# Altium PCB PCB.PcbDoc
Units mm, origin at the board's own origin, x right, y up, seen from the top; angles counter-clockwise.
Board outline 95 x 40.5 mm, 2 copper layers (TOP, BOT), stack 1.636 mm thick; 76 components, 72 nets, 274 pads, 127 vias.
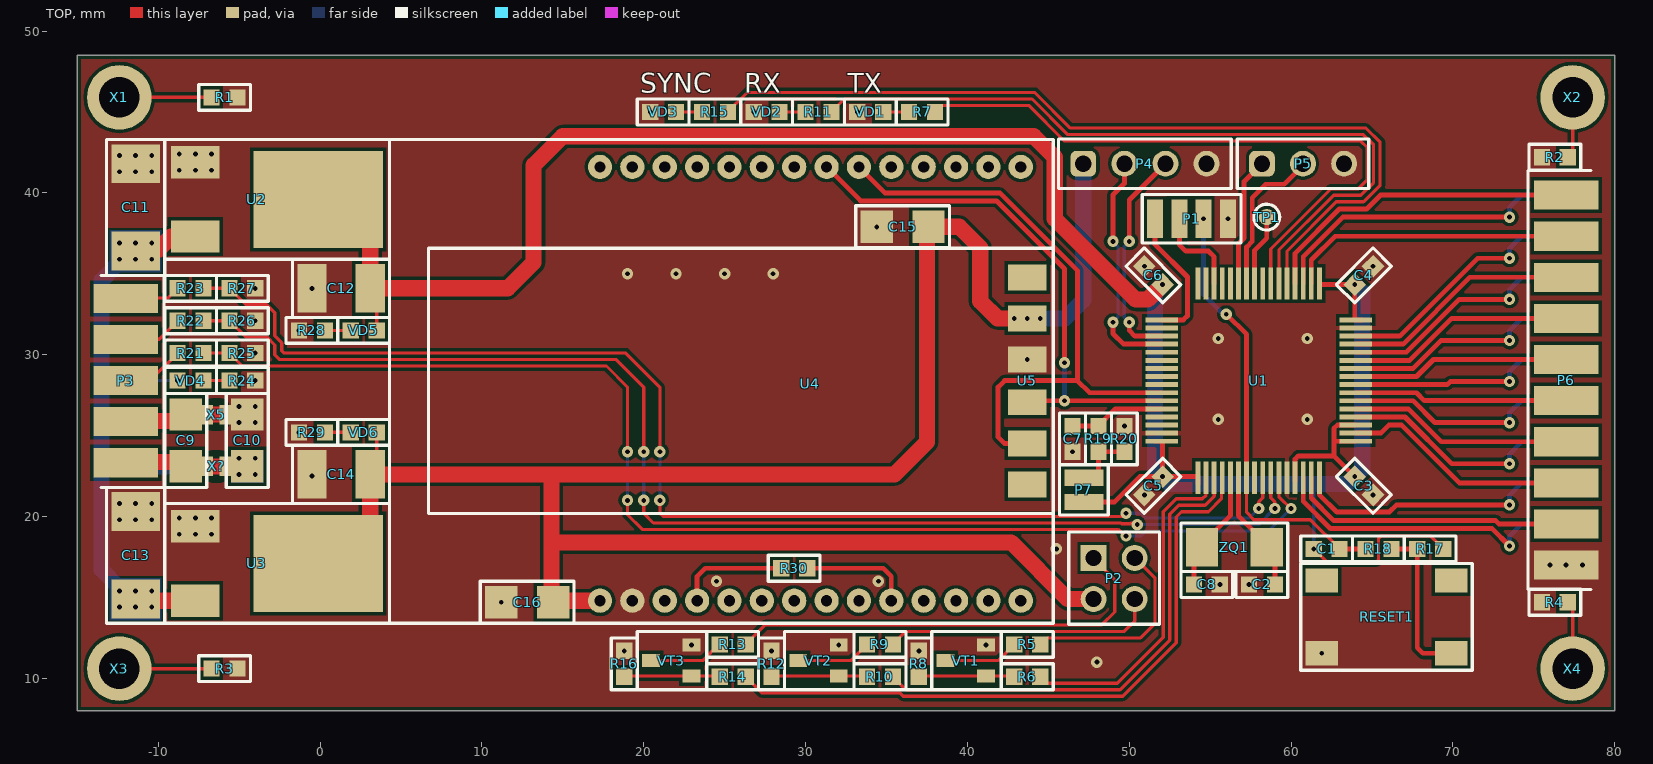
[diagram p0: TOP view]
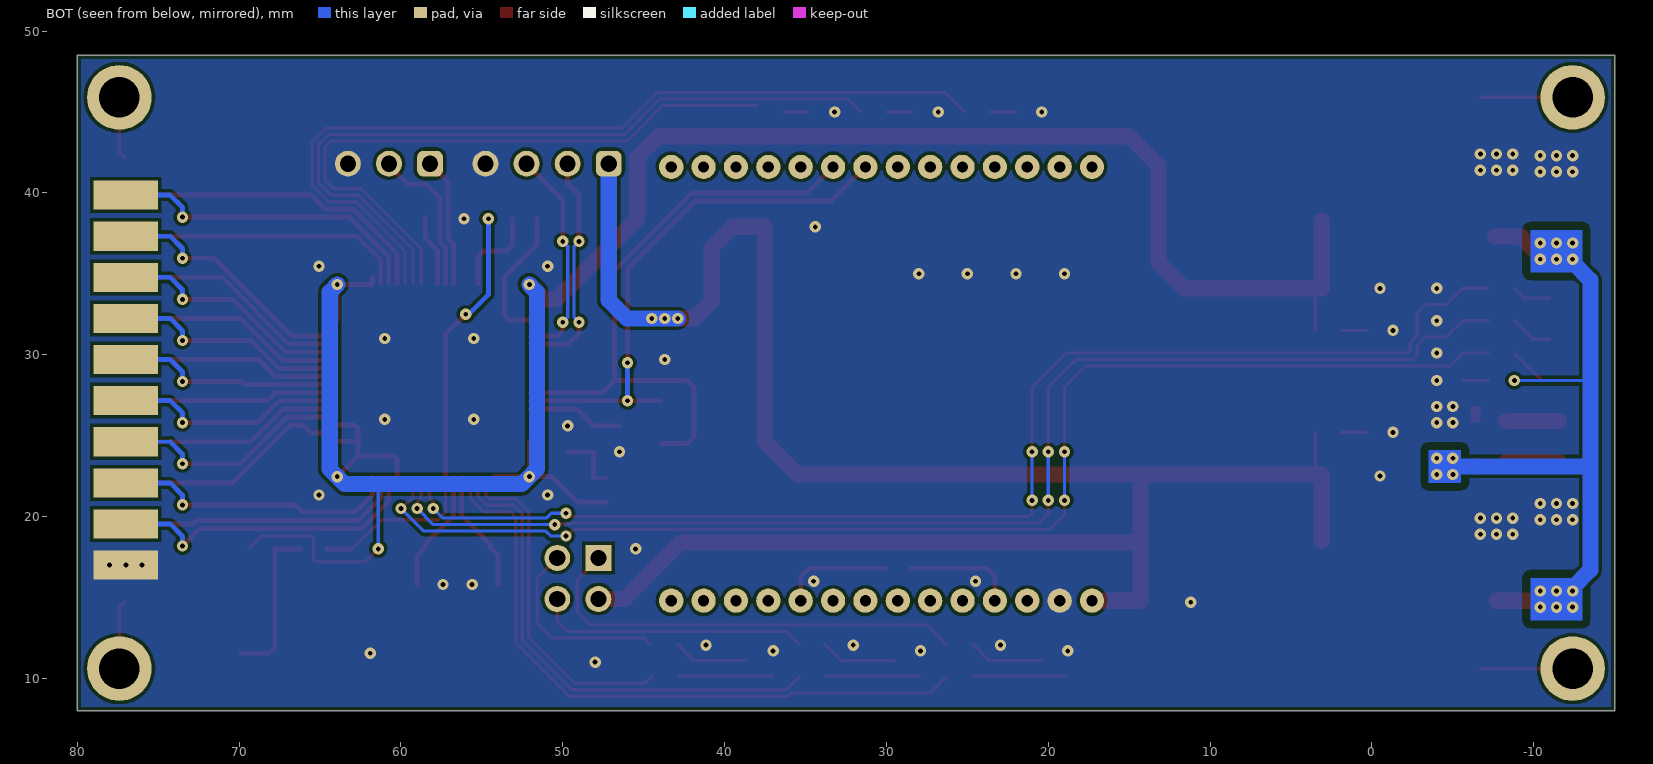
[diagram p1: BOT view, seen from below]

## Layer stack, top to bottom
Top Solder: solder mask 0.0102, Solder Resist, Dk 3.5
TOP: signal copper 0.018
Dielectric 1: core 1.6, FR-4, Dk 4.2
BOT: signal copper 0.018
Bottom Solder: solder mask 0.0102, Solder Resist, Dk 3.5

## Board outline
-15,8 80,8 80,48.5 -15,48.5

## Design rules (kind name [scope] priority, off if disabled: settings)
AssemblyTestPointUsage [All] p1 off:
AssemblyTestpoint [All] p1 off: testpointundercomponent=TRUE minsize=1.016 maxsize=2.54 preferedsize=1.524 minholesize=0 maxholesize=1.016 preferedholesize=0.813 testpointgrid=0.025 usegrid=TRUE gridtolerance=0 allowsidetop=TRUE allowsidebottom=TRUE
BoardOutlineClearance [Not(OnTopSilkscreen Or OnBottomSilkscreen)] p1: gap=0.25 ignorepadtopadclearanceinfootprint=FALSE
Clearance Clearance_NPTH [IsPad And Not(PadIsPlated) And HasRoundHole] p1: gap=0.2 ignorepadtopadclearanceinfootprint=FALSE except(0.25: Arc-Hole Track-Hole SMDPad-Hole THPad-Hole Via-Hole Fill-Hole Poly-Hole Region-Hole Text-Hole) // Non-plated hole to copper
Clearance Clearance_PTH_INT [IsPad And PadIsPlated And HasRoundHole vs OnMid] p2: gap=0.2 ignorepadtopadclearanceinfootprint=FALSE except(0.35: Arc-Hole Track-Hole SMDPad-Hole THPad-Hole Via-Hole Fill-Hole Poly-Hole Region-Hole Text-Hole) // Plated hole without pad to copper
Clearance Clearance_PAD_VIA [IsPad And Not(OnMid) And OnOutside vs IsVia And OnOutside] p3: gap=0.2 ignorepadtopadclearanceinfootprint=FALSE // Minimum gap between SMD pad and via for valid solder mask bridge
Clearance [All] p4: gap=0.2 ignorepadtopadclearanceinfootprint=TRUE except(0.49: Fill-Poly Fill-Region Poly-Poly Poly-Region Region-Region) // Class 4 generic clearance
ComponentClearance ComponentClearanceTop [OnLayer('TOP') And Not(InComponentClass('NoCollision')) And Not(IsNetTieComponent) vs OnLayer('TOP') And Not(InComponentClass('NoCollision')) And Not(IsNetTieComponent)] p1: gap=0.15 collisioncheckmode=3 verticalgap=0.5 showdistances=TRUE
ComponentClearance ComponentClearanceBot [OnLayer('BOT') And Not(InComponentClass('NoCollision')) And Not(IsNetTieComponent) vs OnLayer('BOT') And Not(InComponentClass('NoCollision')) And Not(IsNetTieComponent)] p2: gap=0.15 collisioncheckmode=3 verticalgap=0.5 showdistances=TRUE
DiffPairsRouting [All] p1 off: maxlimit=0.254 minlimit=0.254 mostfreqgap=0.254 toplayer_minwidth=0.381 toplayer_maxwidth=0.381 toplayer_prefwidth=0.381 bottomlayer_minwidth=0.381 bottomlayer_maxwidth=0.381 bottomlayer_prefwidth=0.381 maxuncoupledlength=12.7
FabricationTestPointUsage [All] p1 off: valid=0 allowmultiple=FALSE
FabricationTestpoint [All] p1 off: side=3 testpointundercomponent=TRUE minsize=1.016 maxsize=2.54 preferedsize=1.524 minholesize=0 maxholesize=1.016 preferedholesize=0.813 testpointgrid=0.025 allowsidetop=TRUE allowsidebottom=TRUE usegrid=TRUE gridtolerance=0
FanoutControl Fanout_BGA [IsBGA] p1 off: bgadir=Out bgaviamode=Centered fanoutstyle=Auto fanoutdirection=Alternating viagrid=0.025 // Fanout_BGA (Default Rule)
FanoutControl Fanout_LCC [IsLCC] p2 off: bgadir=Out bgaviamode=Centered fanoutstyle=Auto fanoutdirection=Alternating viagrid=0.025 // Fanout_LCC (Default Rule)
FanoutControl Fanout_SOIC [IsSOIC] p3 off: bgadir=Out bgaviamode=Centered fanoutstyle=Auto fanoutdirection=Alternating viagrid=0.025 // Fanout_SOIC (Default Rule)
FanoutControl Fanout_Small [(CompPinCount < 5)] p4 off: bgadir=Out bgaviamode=Centered fanoutstyle=Auto fanoutdirection=OutThenIn viagrid=0.025 // Fanout_Small (Default Rule)
FanoutControl Fanout_Default [All] p5 off: bgadir=Out bgaviamode=Centered fanoutstyle=Auto fanoutdirection=Alternating viagrid=0.025 // Fanout_Default (Default Rule)
Height [All] p1 off: minheight=0 maxheight=35 prefheight=15
HoleSize HoleSize_PTH [IsVia or (IsPad And PadIsPlated)] p1: absolutevalues=TRUE maxlimit=6 minlimit=0.3 maxpercent=80.000 minpercent=20.000 // Plated holes
HoleSize HoleSize_NPTH [IsPad And Not(PadIsPlated)] p2: absolutevalues=TRUE maxlimit=6 minlimit=0.5 maxpercent=80.000 minpercent=20.000 // Non-plated holes
HoleToHoleClearance [All] p1 off: gap=0.4 allowstackedmicrovias=FALSE
LayerPairs [All] p1 off: enforce=TRUE
MinimumAnnularRing [All] p1: minimumring=0.2
MinimumSolderMaskSliver [Not(InComponent('DD101'))] p1: minsoldermaskwidth=0.15
NetAntennae [Not(InNet('5VIN') Or InNet('GND') Or  InNet('GNDBAT'))] p1: netantennaetolerance=0
PlaneClearance [All] p1 off: clearance=1
PlaneConnect [All] p1 off: planeconnectstyle=Relief reliefexpansion=0.5 reliefentries=4 reliefconductorwidth=0.5 reliefairgap=0.5
PolygonConnect PolygonConnect_Direct [IsPolygon vs InPadClass('HeatsinkPad') Or IsVia or InNet('PGND') or InNet('DGND')] p1: connectstyle=Direct reliefconductorwidth=1 reliefentries=4 polygonreliefangle="45 Angle" airgapwidth=0.5 // Direct connection between POLYCONN pads and shield polygons
PolygonConnect [All] p2: connectstyle=Direct reliefconductorwidth=0.4 reliefentries=4 polygonreliefangle="90 Angle" airgapwidth=0.2
RoutingCorners [All] p1 off: cornerstyle=Round minsetback=2 maxsetback=2
RoutingLayers [All] p1 off: top layer_v5=TRUE bottom layer_v5=TRUE
RoutingPriority [All] p1 off: routingpriority=0
RoutingTopology [All] p1 off: topology=Shortest
RoutingVias [All] p1: holewidth=0.3 width=0.6 viastyle="Through Hole" minholewidth=0.3 minwidth=0.5 maxholewidth=1.2 maxwidth=5
SilkToBoardRegionClearance [All] p1 off:
SilkToSilkClearance [All] p1 off: silktosilkclearance=0
SilkToSolderMaskClearance SilkscreenOverComponentPads [IsPad] p1: minsilkscreentomaskgap=0.15 clearancetoexposedcopper=TRUE
SolderMaskExpansion [All] p1: expansion=0.05
Width [All] p1: maxlimit=90 minlimit=0.2 preferedwidth=0.2 // Class 4
4 further rules are at their usual default settings.

## Components (designator, comment, footprint, x,y, rotation, side; value= is the part's Value field where it differs from the comment)
C1 "1u" C_0603/1608 62.2,18 r0 top
C2 "22p" C_0603/1608 58.2,15.8 r180 top
C3 "10u" C_0603/1608 64.5,21.9 r315 top
C4 "10u" C_0603/1608 64.5,34.9 r45 top
C5 "10u" C_0603/1608 51.5,21.9 r225 top
C6 "10u" C_0603/1608 51.5,34.9 r135 top
C7 "1u" C_0603/1608 46.5,24.8 r270 top
C8 "22p" C_0603/1608 54.8,15.8 r0 top
C9 "10u" C_1206/3216 -8.3,24.7 r270 top
C10 "10u" C_1206/3216 -4.5,24.7 r270 top
C11 "10u" TECAP_TYPE_C -11.4,39.1 r90 top
C12 "10u" TECAP_TYPE_B 1.3,34.1 r180 top
C13 "10u" TECAP_TYPE_C -11.4,17.6 r90 top
C14 "10u" TECAP_TYPE_B 1.3,22.6 r180 top
C15 "10u" C_1206/3216 36,37.9 r180 top
C16 "10u" C_1206/3216 12.8,14.7 r180 top
P1 "Debug" HDR_SMD_1X4_1.50 56.1,38.4 r180 top
P2 "Header 2x2" HDR_M_2X2_2.54 49.07,17.44 r0 top
P3 "Power" HDR_M_1X5_2.54_OUTLINE -14.54,37.29 r90 top
P4 "Rasp Pi" HDR_M_1X4_2.54 50.97,41.8 r0 top
P5 "PowerSupply" HDR_M_1X3_2.54 60.74,41.8 r0 top
P6 "Servo signals" HDR_M_2X10_2.54_OUTLINE 79.54,25.89 r270 top
P7 "BOOT_JMP" HDR_SMD_1X2_1.50 47.2,20.9 r90 top
R1 "100k" R_0603/1608 -5.9,45.9 r0 top
R2 "100k" R_0603/1608 76.3,42.2 r180 top
R3 "100k" R_0603/1608 -5.9,10.6 r0 top
R4 "100k" R_0603/1608 76.3,14.7 r180 top
R5 "?" R_0603/1608 43.7,12.1 r0 top
R6 "10k" R_0603/1608 43.7,10.1 r0 top
R7 "?" R_0603/1608 37.2,45 r180 top
R8 "100k" R_0603/1608 37,10.9 r270 top
R9 "?" R_0603/1608 34.6,12.1 r0 top
R10 "10k" R_0603/1608 34.6,10.1 r0 top
R11 "?" R_0603/1608 30.8,45 r180 top
R12 "100k" R_0603/1608 27.9,10.9 r270 top
R13 "?" R_0603/1608 25.5,12.1 r0 top
R14 "10k" R_0603/1608 25.5,10.1 r0 top
R15 "?" R_0603/1608 24.4,45 r180 top
R16 "100k" R_0603/1608 18.8,10.9 r270 top
R17 "100k" R_0603/1608 68.6,18 r180 top
R18 "1k" R_0603/1608 65.4,18 r180 top
R19 "1k" R_0603/1608 48.1,24.8 r90 top
R20 "100k" R_0603/1608 49.7,24.8 r90 top
R21 "3k3" R_0603/1608 -8,30.1 r180 top
R22 "3k3" R_0603/1608 -8,32.1 r180 top
R23 "3k3" R_0603/1608 -8,34.1 r180 top
R24 "68R" R_0603/1608 -4.8,28.4 r180 top
R25 "5k" R_0603/1608 -4.8,30.1 r180 top
R26 "5k" R_0603/1608 -4.8,32.1 r180 top
R27 "5k" R_0603/1608 -4.8,34.1 r180 top
R28 "68R" R_0603/1608 -0.5,31.5 r0 top
R29 "68R" R_0603/1608 -0.5,25.2 r0 top
R30 "100k" R_0603/1608 29.3,16.8 r0 top
RESET1 "Button SPST" BUTTON_SMD_6x6 65.9,13.8 r90 top
TP1 "Debug pin" TP_SMD_D1.00 58.5,38.5 r0 top
U1 "STM32F373R" LQFP64 58,28.4 r90 top
U2 "LM1117DT-3.3/NOPB" TO252AA/DPAK -2.1,39.6 r270 top
U3 "LM1117DT-5.0/NOPB" TO252AA/DPAK -2.1,17.1 r270 top
U4 "HLK-RM04" HLK-RM04 30.3,27.8 r90 top
U5 "HM-10 BLE" HM-10 43.7,21.88 r90 top
VD1 "LED" LED_0603/1608 34,45 r180 top
VD2 "LED" LED_0603/1608 27.6,45 r180 top
VD3 "LED" LED_0603/1608 21.2,45 r180 top
VD4 "TO-3216BC-BF (G)" LED_0603/1608 -8,28.4 r0 top
VD5 "TO-3216BC-BF (G)" LED_0603/1608 2.7,31.5 r180 top
VD6 "TO-3216BC-BF (G)" LED_0603/1608 2.7,25.2 r180 top
VT1 "IRLML6244" SOT23-3 39.9,11.1 r180 top
VT2 "IRLML6244" SOT23-3 30.8,11.1 r180 top
VT3 "IRLML6244" SOT23-3 21.7,11.1 r180 top
X1 "Mounting hole" HOLE_M2_D4.0/2.5 -12.4,45.9 r0 top
X2 "Mounting hole" HOLE_M2_D4.0/2.5 77.4,45.9 r0 top
X3 "Mounting hole" HOLE_M2_D4.0/2.5 -12.4,10.6 r0 top
X4 "Mounting hole" HOLE_M2_D4.0/2.5 77.4,10.6 r0 top
X5 "" NET_TIE_1.0 -6.4,26.3 r0 top net-tie
X? "" NET_TIE_1.0 -6.4,23.1 r0 top net-tie
ZQ1 "NX5032GA-8MHz" "OSC_2PINS SMD" 56.5,18.1 r0 top

## Footprints (in the part's own frame and the unit in brackets; to place one, negate y for a bottom-side part, rotate by r counter-clockwise, add the part's x,y. Pads: shape width x height; smd on the part's side, far side on the other; paste and mask are expansions set on the pad)
BUTTON_SMD_6x6 [mm] "Simple quad button SMD 6x6mm"
  rect 1.5x2 smd: 1(-2.25,-4) 2(-2.25,4) 3(2.25,-4) 4(2.25,4)
  silkscreen extent -3.3,-5.3 3.3,5.3, body extent -3,-3 3,3, height 1
C_0603/1608 [mm] "Capacitor, SMD, 0603 (1608 metric)"
  rect 1x1 smd mask+0: 1(-0.8,0) 2(0.8,0)
  silkscreen extent -1.6,-0.8 1.6,0.8, body extent -0.8,-0.4 0.8,0.4, height 0.7
C_1206/3216 [mm] "Capacitor, SMD, 1206 (3216 metric)"
  rect 2x2 smd mask+0: 1(-1.6,0) 2(1.6,0)
  silkscreen extent -2.9,-1.3 2.9,1.3, body extent -1.6,-0.8 1.6,0.8, height 1.45
HDR_M_1X3_2.54 [mm] "Pitch 2.54"
  rrect50% 1.6x1.6 hole 1: 1(-2.54,0)
  round 1.6 hole 1: 2(0,0) 3(2.54,0)
  silkscreen extent -4.06,-1.52 4.06,1.52, body extent -3.81,-1.27 3.81,1.27, height 8.54
HDR_M_1X4_2.54 [mm] "Pitch 2.54"
  rrect50% 1.6x1.6 hole 1: 1(-3.81,0)
  round 1.6 hole 1: 2(-1.27,0) 3(1.27,0) 4(3.81,0)
  silkscreen extent -5.33,-1.52 5.33,1.52, body extent -5.08,-1.27 5.08,1.27, height 8.54
HDR_M_1X5_2.54_OUTLINE [mm] "Pitch 2.54"
  rect 1.8x4 smd mask+0: 1(-13.97,-2.54) 2(-11.43,-2.54) 3(-8.89,-2.54) 4(-6.35,-2.54) 5(-3.81,-2.54)
  silkscreen extent -15.49,-4.9 -2.4,-1, body extent -15.3,-3 -2.6,8.54, height 1.67
HDR_M_2X2_2.54 [mm] "Pitch 2.54"
  round 1.6 hole 1: 1(-1.27,-2.54) 3(1.27,-2.54) 4(1.27,0)
  rect 1.6x1.6 hole 1: 2(-1.27,0)
  silkscreen extent -2.8,-4.1 2.8,1.6, body extent -2.54,-3.81 2.54,1.27, height 8.54
HDR_M_2X10_2.54_OUTLINE [mm] "Pitch 2.54"
  rect 1.8x4 smd mask+0: 1(-13.97,-2.54) 3(-11.43,-2.54) 5(-8.89,-2.54) 7(-6.35,-2.54) 9(-3.81,-2.54) 11(-1.27,-2.54) 13(1.27,-2.54) 15(3.81,-2.54) 17(6.35,-2.54) 19(8.89,-2.54)
  rect 1.8x4 smd far side mask+0: 2(-13.97,-2.54) 4(-11.43,-2.54) 6(-8.89,-2.54) 8(-6.35,-2.54) 10(-3.81,-2.54) 12(-1.27,-2.54) 14(1.27,-2.54) 16(3.81,-2.54) 18(6.35,-2.54) 20(8.89,-2.54)
  silkscreen extent -15.49,-4.9 10.4,-1, body extent -15.3,-3 10.1,8.54, height 1.67
HDR_SMD_1X2_1.50 [mm] "Pitch 1.50"
  rect 1x2.4 smd mask+0: 1(0,0) 2(1.5,0)
  silkscreen extent -0.8,-1.5 2.3,1.5
HDR_SMD_1X4_1.50 [mm] "Pitch 1.50"
  rect 1x2.4 smd mask+0: 1(0,0) 2(1.5,0) 3(3,0) 4(4.5,0)
  silkscreen extent -0.8,-1.5 5.3,1.5
HLK-RM04 [mm]
  round 1.5 hole 0.7: 1(-13,13) 2(-13,11) 3(-13,9) 4(-13,7) 5(-13,5) 6(-13,3) 7(-13,1) 8(-13,-1) 9(-13,-3) 10(-13,-5) 11(-13,-7) 12(-13,-9) 13(-13,-11) 14(-13,-13) 15(13.8,-13) 16(13.8,-11) 17(13.8,-9) 18(13.8,-7) 19(13.8,-5) 20(13.8,-3) 21(13.8,-1) 22(13.8,1) 23(13.8,3) 24(13.8,5) 25(13.8,7) 26(13.8,9) 27(13.8,11) 28(13.8,13)
  silkscreen extent -14.4,-15 15.5,26, body extent -14,-14.5 15.06,25.6, height 8.82
HM-10 [mm]
  rect 1.6x2.4 smd mask+0: 1(0.1,0) 2(2.64,0) 3(5.18,0) 4(7.82,0) 5(10.36,0) 6(12.9,0)
  silkscreen extent -1.7,-1.6 14.7,37, body extent -1.3,-1.2 14.4,36.5, height 3.7
HOLE_M2_D4.0/2.5 [mm]
  round 4 hole 2.5: 1(0,0)
LED_0603/1608 [mm] "LED, SMD, 0603 (1608 metric)"
  rect 1x1 smd: A(-0.8,0) C(0.8,0)
  silkscreen extent -1.6,-0.8 1.6,0.8, body extent -0.8,-0.4 0.8,0.4, height 0.6
LQFP64 [mm]
  rect 2x0.3 smd mask+0.1: 1(-6,3.75) 2(-6,3.25) 3(-6,2.75) 4(-6,2.25) 5(-6,1.75) 6(-6,1.25) 7(-6,0.75) 8(-6,0.25) 9(-6,-0.25) 10(-6,-0.75) 11(-6,-1.25) 12(-6,-1.75) 13(-6,-2.25) 14(-6,-2.75) 15(-6,-3.25) 16(-6,-3.75) 33(6,-3.75) 34(6,-3.25) 35(6,-2.75) 36(6,-2.25) 37(6,-1.75) 38(6,-1.25) 39(6,-0.75) 40(6,-0.25) 41(6,0.25) 42(6,0.75) 43(6,1.25) 44(6,1.75) 45(6,2.25) 46(6,2.75) 47(6,3.25) 48(6,3.75)
  rect 0.3x2 smd mask+0.1: 17(-3.75,-6) 18(-3.25,-6) 19(-2.75,-6) 20(-2.25,-6) 21(-1.75,-6) 22(-1.25,-6) 23(-0.75,-6) 24(-0.25,-6) 25(0.25,-6) 26(0.75,-6) 27(1.25,-6) 28(1.75,-6) 29(2.25,-6) 30(2.75,-6) 31(3.25,-6) 32(3.75,-6) 49(3.75,6) 50(3.25,6) 51(2.75,6) 52(2.25,6) 53(1.75,6) 54(1.25,6) 55(0.75,6) 56(0.25,6) 57(-0.25,6) 58(-0.75,6) 59(-1.25,6) 60(-1.75,6) 61(-2.25,6) 62(-2.75,6) 63(-3.25,6) 64(-3.75,6)
  body extent -6,-6 6,6, height 1.6
NET_TIE_1.0 [mm] "Net tie, 0.8mm width"
  rect 1.2x1.2 smd mask-1: 1(-0.8,0) 2(0.8,0)
  TOP region: -0.3,-0.5 0.3,-0.5 0.3,0.5 -0.3,0.5
  body extent -0.2,-0.4 0.2,0.4, height 0.1
"OSC_2PINS SMD" [mm] "Crystal oscillator, SMD, 2 pins"
  rect 2x2.4 smd: 1(-2,0) 2(2,0)
  silkscreen extent -3.3,-1.5 3.3,1.5, body extent -1.6,-1.26 1.6,1.26, height 1
R_0603/1608 [mm] "Resistor, SMD, 0603 (1608 metric)"
  rect 1x1 smd mask+0: 1(-0.8,0) 2(0.8,0)
  silkscreen extent -1.6,-0.8 1.6,0.8, body extent -0.8,-0.4 0.8,0.4, height 0.45
SOT23-3 [mm] "SOT23, 3 pins"
  rect 1.1x0.8 smd: 1(-1.25,0.95) 2(-1.25,-0.95) 3(1.25,0)
  silkscreen extent -2.2,-1.8 2.1,1.8, body extent -1.13,-1.5 1.13,1.5, height 1.22
TECAP_TYPE_B [mm] "Tantalum capacitor, Type B, SMD"
  rect 1.8x3 smd: 1(-1.8,0) 2(1.8,0)
  silkscreen extent -3,-1.8 3,1.8, body extent -1.85,-1.5 1.85,1.5, height 2.1
TECAP_TYPE_C [mm] "Tantalum capacitor, Type C, SMD"
  rect 2.4x3 smd: 1(-2.7,0) 2(2.7,0)
  silkscreen extent -4.2,-1.8 4.2,1.8, body extent -3.1,-1.7 3.1,1.7, height 2.8
TO252AA/DPAK [mm] "TO252AA/DPAK package"
  rect 2x3 smd: 1(-2.3,-5.6) 2(2.3,-5.6)
  rect 6x8 smd: 3(0,2)
  silkscreen extent -3.7,-7.5 3.7,6.4, body extent -3.37,-6.01 3.37,4.38, height 2.39
TP_SMD_D1.00 [mm] "SMD test point, 1.0 mm diameter"
  round 1 smd paste-10: 1(0,0)
  silkscreen extent -0.8,-0.8 0.8,0.8, body extent -0.5,-0.5 0.5,0.5, height 0.1

## Part data
C1 C2 C3 C4 C5 C6 C7 C8 C9 C10 C15 C16: library part Capacitor, "Non-polarized capacitor"
C11 C12 C13 C14: library part "Capacitor polar", "Polarized capacitor"
P1 P4: library part "Header 4", "Header, 4-Pin", LatestRevisionDate=17-Jul-2002, LatestRevisionNote="Re-released for DXP Platform.", Publisher="Altium Limited"
P2: "Header, 2-Pin", LatestRevisionDate=17-Jul-2002, LatestRevisionNote="Re-released for DXP Platform.", Publisher="Altium Limited"
P3: library part "Header 5", "Header, 5-Pin", LatestRevisionDate=17-Jul-2002, LatestRevisionNote="Re-released for DXP Platform.", Publisher="Altium Limited"
P5: library part "Header 3", "Header, 3-Pin", LatestRevisionDate=17-Jul-2002, LatestRevisionNote="Re-released for DXP Platform.", Publisher="Altium Limited"
P6: library part "Header 2x10", "Header, 20-Pin", LatestRevisionDate=17-Jul-2002, LatestRevisionNote="Re-released for DXP Platform.", Publisher="Altium Limited"
P7: library part "Header 2", "Header, 2-Pin", LatestRevisionDate=17-Jul-2002, LatestRevisionNote="Re-released for DXP Platform.", Publisher="Altium Limited"
R1 R2 R3 R4 R5 R6 R7 R8 R9 R10 R11 R12 R13 R14 R15 R16 R17 R18 R19 R20 R21 R22 R23 R24 R25 R26 R27 R28 R29 R30: library part Resistor, "Resistor"
RESET1: "Button SPST, without fixation"
TP1: library part "Test point", "Test point"
U1: "32-bit Cortex-M3"
U2 U3: library part LM1117, "LDO voltage regulator"
U4: "WIFI-UART bridge"
U5: "BLE-UART bridge"
VD4 VD5 VD6: library part LED, "LED"
VT1 VT2 VT3: library part "MOSFET N", "MOSFET N"
X1 X2 X3 X4: "Hole for screw M3, outline D6"
X5 X?: library part "Net tie", "Net tie"
ZQ1: library part "Crystal oscillator", "Crystal oscillator"

## Via types
v1: diameter 0.7, hole 0.3, TOP to BOT, tented both sides, 127 vias

## Nets (pads, with @x,y where several pads share a name; then routed paths per layer and width w, separated by ;. In a path a pad name is that pad's centre, name@x,y a point inside that pad or via, vN(x,y) a via of type N, cw(c..) or ccw(c..) an arc to the next point about the centre after c; other vN are vias at no path point)
BLE_RX: U1.58 U4.20 U5.2 | length 38.8
  TOP w0.3: U4.20 34.9,40 42.007,40 46.8,35.207 46.8,28.4 ; U5.2@43.9,24.52 U5.2 42.28,24.52 41.9,24.9 41.9,28 42.3,28.4 46.8,28.4 ; U1.58 47.55,27.65 46.8,28.4
BLE_TX: U1.59 U4.21 U5.3 | length 33.6
  TOP w0.2: U5.3@43.9,27.06 U5.3@43.99,27.15
  TOP w0.3: U4.21 33.4,39.5 41.8,39.5 46,35.3 v1(46,29.5) ; U5.3@43.99,27.15 v1(46,27.15) U1.59
  BOT w0.3: v1(46,27.15) v1(46,29.5)
COMM_LED_RX: R11.1 U1.38 | length 47
  TOP w0.2: R11.1 32.4,45.8 44,45.8 46.2,43.6 64.466,43.6 65.1,42.966 65.1,40.634 64.316,39.85 62.634,39.85 59.25,36.466 U1.38
COMM_LED_TX: R7.1 U1.39 | length 39.6
  TOP w0.2: R7.1@38,45.4 43.8,45.4 46,43.2 64.3,43.2 64.7,42.8 64.7,40.8 64.15,40.25 62.468,40.25 58.75,36.532 U1.39
DGND: C2.2 C3.2 C4.2 C5.2 C6.2 C7.2 C8.2 C10.1 C11.2 C12.2 C13.2 C14.2 C15.2 C16.2 P1.1 P4.4 P5.3 P6.19 P6.20 R1.2 R2.2 R3.2 R4.2 R8.1 R12.1 R16.1 R20.2 R24.1 R25.1 R26.1 R27.1 R28.1 R29.1 RESET1.2 U1.12 U1.31 U1.63 U2.1 U3.1 U4.2 U5.4 VD1.C VD2.C VD3.C VT1.2 VT2.2 VT3.2 X5.2
  other v1: 48,11 61.9,11.55 18.8,11.7 27.9,11.7 37,11.7 22.95,12.05 32.05,12.05 41.15,12.05 11.2,14.7 55.6,15.8 57.4,15.8 24.5,16 34.5,16 76,17 77,17 78,17 45.5,18 -8.7,18.9 -7.7,18.9 -6.7,18.9 -12.4,19.8 -11.4,19.8 -10.4,19.8 -8.7,19.9 -7.7,19.9 -6.7,19.9 -12.4,20.8 -11.4,20.8 -10.4,20.8 50.934,21.334 65.066,21.334 -0.5,22.5 46.5,24 -1.3,25.2 49.7,25.6 -5,25.8 -4,25.8 55.5,26 61,26 -5,26.8 -4,26.8 -4,28.4 43.7,29.7 -4,30.1 55.5,31 61,31 -1.3,31.5 -4,32.1 -4,34.1 -0.5,34.1 19,35 22,35 25,35 28,35 50.934,35.466 65.066,35.466 34.4,37.9 56.1,38.4 -12.4,41.3 -11.4,41.3 -10.4,41.3 -8.7,41.4 -7.7,41.4 -6.7,41.4 -12.4,42.3 -11.4,42.3 -10.4,42.3 -8.7,42.4 -7.7,42.4 -6.7,42.4 20.4,45 26.8,45 33.2,45
DVDD_3V3: C1.1 C3.1 C4.1 C5.1 C6.1 C12.1 P7.1 R17.1 U1.1 U1.13 U1.17 U1.19 U1.32 U1.33 U1.64 U2.3 VD5.A | length 147.2
  TOP w0.2: C12.1 3.5,33.7 VD5.A ; v1(61.4,18) 62.2,17.2 65.3,17.2 65.4,17.3 65.4,18.624 65.576,18.8 68.6,18.8 R17.1
  TOP w0.3: P7.1@47.3,20.9 49.1,20.9 50.666,22.466 v1(52.066,22.466) ; U1.64@51.6,24.65 52.066,24.65 v1(52.066,22.466) ; U1.1@54.25,22 54.25,22.466 v1(52.066,22.466) ; U1.13@60.25,22.2 U1.13 60.25,23.45 60.25,23.545 60.455,23.75 60.55,23.75 62.65,23.75 ; U1.33@61.75,34.8 U1.33 61.75,34.334 v1(63.934,34.334) 63.934,32.15 U1.32 U1.32@64.4,32.15 ; v1(63.934,22.466) 62.65,23.75 ; U1.17 62.65,24.65 ; U1.19 62.95,25.65 62.855,25.65 62.65,25.445 62.65,24.65 ; 62.65,23.75 62.65,24.65
  TOP w1: U2.3@3.1,38.3 C12.1 11.6,34.1 13.2,35.7 13.2,41.7 15,43.5 44.1,43.5 45.4,42.2 45.4,38.4 50.4,33.4 51.131,33.4 v1(52.066,34.334)
  BOT w0.2: v1@61.4,17.9 v1(61.4,18) 61.4,22
  BOT w1: v1(52.066,34.334) 51.6,33.869 51.6,22.931 v1(52.066,22.466) 52.531,22 61.4,22 63.469,22 v1(63.934,22.466) 64.4,22.931 64.4,33.869 v1(63.934,34.334)
DVDD_5V0: C14.1 C15.1 C16.1 P2.1 P4.1 U3.3 U4.1 U5.5 VD6.A | length 124.2
  TOP w0.2: C14.1 3.5,23 VD6.A
  TOP w1: U3.3@3.1,18.5 C14.1 14.3,22.6 ; U4.1 14.3,14.8 14.3,18.4 ; U5.5@43.1,32.24 v1(42.9,32.24) 41.86,32.24 40.8,33.3 40.8,36.6 39.5,37.9 C15.1 37.5,37.9 37.5,24.6 35.5,22.6 14.3,22.6 ; P2.1 46.2,14.9 42.7,18.4 14.3,18.4 ; 14.3,18.4 14.3,22.6
  BOT w1: v1(42.9,32.24) v1(43.7,32.24) v1(44.5,32.24) 46.04,32.24 47.16,33.36 P4.1
FRONT_LED_B: P2.2 R13.2 | length 27.5
  TOP w0.2: R13.2 27.5,13.3 48.3,13.3 49.1,14.1 49.1,16.1 P2.2@47.8,17.4
FRONT_LED_B_CTRL: R14.2 U1.4 | length 40.8
  TOP w0.2: R14.2 27.3,9.1 35.834,9.1 36.034,8.9 49.6,8.9 52.9,12.2 52.9,19.969 53.231,20.3 54.9,20.3 55.7,21.1 55.7,22.35 U1.4
FRONT_LED_G: P2.3 R9.2 | length 16.9
  TOP w0.2: R9.2 36.2,12.9 49.7,12.9 50.34,13.54 P2.3
FRONT_LED_G_CTRL: R10.2 U1.3 | length 30.8
  TOP w0.2: R10.2 36.2,9.3 49.434,9.3 52.5,12.366 52.5,20.134 53.066,20.7 54.69,20.7 55.25,21.26 U1.3
FRONT_LED_R: P2.4 R5.2 | length 12.1
  TOP w0.2: R5.2@44.6,12.1 45,12.5 50.7,12.5 51.6,13.4 51.6,16.18 P2.4
FRONT_LED_R_CTRL: R6.2 U1.2 | length 20.9
  TOP w0.2: R6.2 44.9,9.7 49.269,9.7 52.1,12.531 52.1,20.3 52.9,21.1 54.524,21.1 54.75,21.326 U1.2
LED_SYNCHRO: R15.1 U1.37 | length 54.2
  TOP w0.2: R15.1 26.4,46.2 44.166,46.2 46.366,44 64.631,44 65.5,43.131 65.5,40.469 64.481,39.45 62.799,39.45 59.749,36.4 U1.37
MCU_BOOT: C7.1 R19.2 U1.60 | length 5.9
  TOP w0.3: C7.1 R19.2 49.15,26.65 U1.60
MCU_RESET#: C1.2 P1.2 R18.2 U1.7 | length 27.6
  TOP w0.2: U1.7 57.25,20.25 57.7,19.8 61.2,19.8 C1.2
  TOP w0.3: v1(56,32.5) 57.25,31.25 U1.7 ; C1.2@63.05,18 R18.2
  BOT w0.3: v1(54.6,38.4) 54.6,33.7 55.8,32.5 v1(56,32.5)
MCU_SWCLK: P1.4 U1.49 | length 8.5
  TOP w0.3: P1.4 51.6,36.8 53.6,34.8 53.6,32.4 53.35,32.15 U1.49
MCU_SWDIO: P1.3 U1.46 | length 5.7
  TOP w0.3: P1.3 53.1,36.8 53.5,36.4 54.9,36.4 55.25,36.05 U1.46
NetP7_2: P7.2 R19.1 R20.1 | length 4
  TOP w0.2: P7.2@47.3,22.4 P7.2@48.1,22.4
  TOP w0.3: P7.2@48.1,22.4 R19.1 R20.1
NetR1_1: R1.1 X1.1 | length 5.7
  TOP w0.2: X1.1 R1.1
NetR2_1: R2.1 X2.1 | length 3.8
  TOP w0.2: R2.1 77.4,42.5 X2.1
NetR3_1: R3.1 X3.1 | length 5.7
  TOP w0.2: X3.1 R3.1
NetR4_1: R4.1 X4.1 | length 4.2
  TOP w0.2: R4.1 77.4,14.4 X4.1
NetR5_1: R5.1 VT1.3 | length 4.7
  TOP w0.2: VT1.3 41.9,11.1 R5.1
NetR6_1: R6.1 R8.2 VT1.1 | length 5.8
  TOP w0.2: R8.2@37.05,10.15 VT1.1 R6.1@42.85,10.15
NetR7_2: R7.2 VD1.A | length 1.6
  TOP w0.2: VD1.A R7.2
NetR9_1: R9.1 VT2.3 | length 4.7
  TOP w0.2: VT2.3 32.8,11.1 R9.1
NetR10_1: R10.1 R12.2 VT2.1 | length 5.8
  TOP w0.2: R12.2@27.95,10.15 VT2.1 R10.1@33.75,10.15
NetR11_2: R11.2 VD2.A | length 1.6
  TOP w0.2: VD2.A R11.2
NetR13_1: R13.1 VT3.3 | length 4.7
  TOP w0.2: VT3.3@20.4,11.1 VT3.3 23.65,11.1 R13.1@24.65,12.1
NetR14_1: R14.1 R16.2 VT3.1 | length 5.8
  TOP w0.2: R16.2@18.85,10.15 VT3.1 R14.1@24.65,10.15
NetR15_2: R15.2 VD3.A | length 1.6
  TOP w0.2: VD3.A R15.2
NetR17_2: R17.2 R18.1 RESET1.1 | length 9.8
  TOP w0.3: R18.1 R17.2 ; R17.2@67.8,17.9 67.8,11.9 68.15,11.55 RESET1.1
NetR24_2: R24.2 VD4.C | length 1.6
  TOP w0.2: VD4.C R24.2
NetR28_2: R28.2 VD5.C | length 1.6
  TOP w0.2: R28.2 VD5.C
NetR29_2: R29.2 VD6.C | length 1.6
  TOP w0.2: R29.2 VD6.C
NetR30_1: R30.1 U4.4 | length 6.9
  TOP w0.3: U4.4 23.3,16.3 23.8,16.8 R30.1
NetR30_2: R30.2 U4.10 | length 6.9
  TOP w0.3: R30.2 34.8,16.8 35.3,16.3 U4.10
NetTP1_1: TP1.1 U1.41 | length 4.4
  TOP w0.3: U1.41 57.75,36.441 58.5,37.191 TP1.1
OSC_HSE_A: C2.1 U1.6 ZQ1.2 | length 7.5
  TOP w0.3: U1.6 56.75,20.05 58.5,18.3 ZQ1.2 59,17.6 C2.1
OSC_HSE_B: C8.1 U1.5 ZQ1.1 | length 7.5
  TOP w0.3: C8.1 54,17.6 ZQ1.1 54.5,18.3 56.25,20.05 U1.5
PGND: C9.1 P3.2 X5.1 | length 3.3
  TOP w1: P3.2@-11.56,25.9 C9.1@-8.3,25.9
PWR_RX: P5.2 U1.42 | length 9.6
  TOP w0.3: U1.42 57.25,36.648 57.6,36.998 57.6,39.7 58.43,40.53 59.57,40.53 P5.2@60.84,41.8
PWR_TX: P5.1 U1.43 | length 8
  TOP w0.3: U1.43 56.75,36.855 57.1,37.205 57.1,40.7 P5.1
RASP_PI_RX: P4.3 U1.51 | length 13.6
  TOP w0.3: v1(50,32) 50,31.5 50.35,31.15 U1.51 ; v1(50,37) 50,39.56 P4.3
  BOT w0.2: v1(50,32) 49.7,32.3 49.7,36.7 v1(50,37)
RASP_PI_TX: P4.2 U1.52 | length 14.3
  TOP w0.3: v1(49,32) 49,31.3 49.65,30.65 U1.52 ; v1(49,37) 49,39.876 49.7,40.576 P4.2
  BOT w0.2: v1(49,32) 49.3,32.3 49.3,36.7 v1(49,37)
SERVO_1: P6.1 U1.36 | length 20.1
  TOP w0.3: U1.36 60.25,36.264 62.986,39 64.668,39 65.528,39.86 P6.1
SERVO_2: P6.2 U1.35 | length 19.8
  TOP w0.3: U1.35 60.75,36.057 63.193,38.5 v1(73.5,38.5)
  BOT w0.3: v1(73.5,38.5) 73.5,39.1 74.26,39.86 P6.2
SERVO_3: P6.3 U1.34 | length 17.8
  TOP w0.3: U1.34 61.25,35.85 62.72,37.32 P6.3
SERVO_4: P6.4 U1.30 | length 15.9
  TOP w0.3: U1.30 66.714,31.15 71.524,35.96 v1(73.5,35.96)
  BOT w0.3: v1(73.5,35.96) 73.5,36.56 74.26,37.32 P6.4
SERVO_5: P6.5 U1.29 | length 14.7
  TOP w0.3: U1.29 66.922,30.65 71.052,34.78 P6.5
SERVO_6: P6.6 U1.28 | length 15.3
  TOP w0.3: U1.28 67.129,30.15 70.399,33.42 v1(73.5,33.42)
  BOT w0.3: v1(73.5,33.42) 73.5,34.02 74.26,34.78 P6.6
SERVO_7: P6.7 U1.27 | length 14.1
  TOP w0.3: U1.27 67.336,29.65 69.926,32.24 P6.7
SERVO_8: P6.8 U1.26 | length 14.6
  TOP w0.3: U1.26 67.543,29.15 69.273,30.88 v1(73.5,30.88)
  BOT w0.3: v1(73.5,30.88) 73.5,31.48 74.26,32.24 P6.8
SERVO_9: P6.9 U1.25 | length 13.4
  TOP w0.3: U1.25 67.75,28.65 68.8,29.7 P6.9
SERVO_10: P6.10 U1.24 | length 14
  TOP w0.3: U1.24 69.65,28.15 69.84,28.34 v1(73.5,28.34)
  BOT w0.3: v1(73.5,28.34) 73.5,28.94 74.26,29.7 P6.10
SERVO_11: P6.11 U1.23 | length 13.2
  TOP w0.3: U1.23 67.75,27.65 68.24,27.16 P6.11
SERVO_12: P6.12 U1.22 | length 14.5
  TOP w0.3: U1.22 67.543,27.15 68.893,25.8 v1(73.5,25.8)
  BOT w0.3: v1(73.5,25.8) 73.5,26.4 74.26,27.16 P6.12
SERVO_13: P6.13 U1.21 | length 13.8
  TOP w0.3: U1.21 67.25,26.65 69.28,24.62 P6.13
SERVO_14: P6.14 U1.20 | length 15.1
  TOP w0.3: U1.20 67.043,26.15 69.933,23.26 v1(73.5,23.26)
  BOT w0.2: 74.26,24.62 P6.14
  BOT w0.3: v1(73.5,23.26) 73.5,23.86 74.26,24.62
SERVO_15: P6.15 U1.18 | length 14.7
  TOP w0.3: U1.18 65.55,25.15 66.05,25.65 66.836,25.65 70.406,22.08 P6.15
SERVO_16: P6.16 U1.16 | length 17.8
  TOP w0.3: U1.16 61.75,21.35 62.823,20.277 66.077,20.277 66.52,20.72 v1(73.5,20.72)
  BOT w0.3: v1(73.5,20.72) 73.5,21.32 74.26,22.08 P6.16
SERVO_17: P6.17 U1.15 | length 17.7
  TOP w0.3: U1.15 61.25,21.143 62.643,19.75 72.637,19.75 72.847,19.54 P6.17
SERVO_18: P6.18 U1.14 | length 19.8
  TOP w0.3: U1.14 60.75,20.936 62.436,19.25 72.43,19.25 v1(73.5,18.18)
  BOT w0.3: v1(73.5,18.18) 73.5,18.78 74.26,19.54 P6.18
VCELL_1: P3.3 R21.2 | length 2.4
  TOP w0.2: P3.3@-10.48,28.42 R21.2
VCELL_1_ADC: R21.1 R25.2 U1.11 | length 79.4
  TOP w0.2: R21.1 R25.2 -4.8,29.3 17.7,29.3 19,28 v1(19,24) ; v1(19,21) 19,20.1 19.9,19.2 49.315,19.2 49.715,18.8 v1(49.8,18.8) ; U1.11 59.25,21.216 59.966,20.5 v1(60,20.5)
  BOT w0.2: v1(19,21) v1(19,24) ; v1(49.8,18.8) 50.76,18.8 51.06,19.1 58.6,19.1 v1(60,20.5)
VCELL_2: P3.4 R22.2 | length 2.7
  TOP w0.2: P3.4@-11,30.96 -9.94,30.96 R22.2
VCELL_2_ADC: R22.1 R26.2 U1.10 | length 78.8
  TOP w0.2: R22.1 R26.2 -4.6,31.1 -3.3,31.1 -2.8,30.6 -2.8,30 -2.5,29.7 18.3,29.7 20,28 v1(20,24) ; v1(20,21) 20,20.2 20.6,19.6 49.481,19.6 49.531,19.55 50.069,19.55 50.119,19.6 50.4,19.6 v1(50.5,19.5) ; U1.10 58.75,21.15 59,20.9 v1(59,20.5)
  BOT w0.2: v1(20,21) v1(20,24) ; v1(50.5,19.5) 58,19.5 v1(59,20.5)
VCELL_3: P3.5 R23.2 | length 2.4
  TOP w0.2: P3.5@-11,33.5 -9.4,33.5 R23.2
VCELL_3_ADC: R23.1 R27.2 U1.9 | length 79.2
  TOP w0.2: R23.1 R27.2 -4.6,33.1 -3.3,33.1 -2.8,32.6 -2.8,31.166 -2.359,30.724 -2.359,30.241 -2.217,30.1 18.9,30.1 21,28 v1(21,24) ; v1(21,21) 21,20.2 21.2,20 49.6,20 v1(49.8,20.2) ; v1(58,20.5) 58,20.9 58.25,21.15 U1.9
  BOT w0.2: v1(21,21) v1(21,24) ; v1(49.8,20.2) 50.719,20.2 51.019,19.9 57.4,19.9 v1(58,20.5)
VDD_11V1: C10.2 C11.1 C13.1 U2.2 U3.2 VD4.A X?.2 | length 42.5
  TOP w1: C11.1 -10.1,36.4 -9.2,37.3 U2.2 U2.2@-7.6,37.3 ; C13.1@-11.3,14.8 U3.2
  BOT w0.2: -13.5,28.4 v1(-8.8,28.4)
  BOT w1: v1@-12.4,15.6 -13.5,16.7 -13.5,23.1 ; v1@-12.4,35.7 -13.5,34.6 -13.5,28.4 -13.5,23.1 ; -4.5,23.1 -13.5,23.1
  other v1: -12.4,14.4 -11.4,14.4 -10.4,14.4 -12.4,15.4 -11.4,15.4 -10.4,15.4 -5,22.6 -4,22.6 -5,23.6 -4,23.6 -12.4,35.9 -11.4,35.9 -10.4,35.9 -12.4,36.9 -11.4,36.9 -10.4,36.9
VIN_11V1: C9.2 P3.1 X?.1 | length 3.3
  TOP w1: P3.1@-11.56,23.36 C9.2@-8.3,23.36
pads on no net: RESET1.3 RESET1.4 U1.8 U1.40 U1.44 U1.45 U1.47 U1.48 U1.50 U1.53 U1.54 U1.55 U1.56 U1.57 U1.61 U1.62 U4.3 U4.5 U4.6 U4.7 U4.8 U4.9 U4.11 U4.12 U4.13 U4.14 U4.15 U4.16 U4.17 U4.18 U4.19 U4.22 U4.23 U4.24 U4.25 U4.26 U4.27 U4.28 U5.1 U5.6

## Polygon pours and split planes (outlines as drawn)
DGND on BOT "BOT_DGND" (solid, remove dead copper, pour order 31): -15,8 80,8 80,48.5 -15,48.5
DGND on TOP "TOP_DGND" (solid, remove dead copper, pour order 33): -15,8 80,8 80,48.5 -15,48.5

## Other copper
BOT:
  region net VDD_11V1: -3.5,24.1 -3.5,22.1 -5.5,22.1 -5.5,24.1
  region net VDD_11V1: -9.8,37.7 -9.8,35.1 -13,35.1 -13,37.7
  region net VDD_11V1: -9.8,16.2 -9.8,13.6 -13,13.6 -13,16.2

## Silkscreen, mask and mechanical layers (free items; w line width, h text height)
Top Overlay:
  text "SYNC" at 19.8,46.2 h1.2
  text "RX" at 26.2,46.2 h1.2
  text "TX" at 32.6,46.2 h1.2
M4-BOARD:
  the board outline again, w0.2